# Altium PCB PCB balance.PcbDoc
Units mil, origin at the board's own origin, x right, y up, seen from the top; angles counter-clockwise.
Board outline 3947.04 x 3164.64 mil, 2 copper layers (Top Layer, Bottom Layer); 67 components, 78 nets, 302 pads, 105 vias.
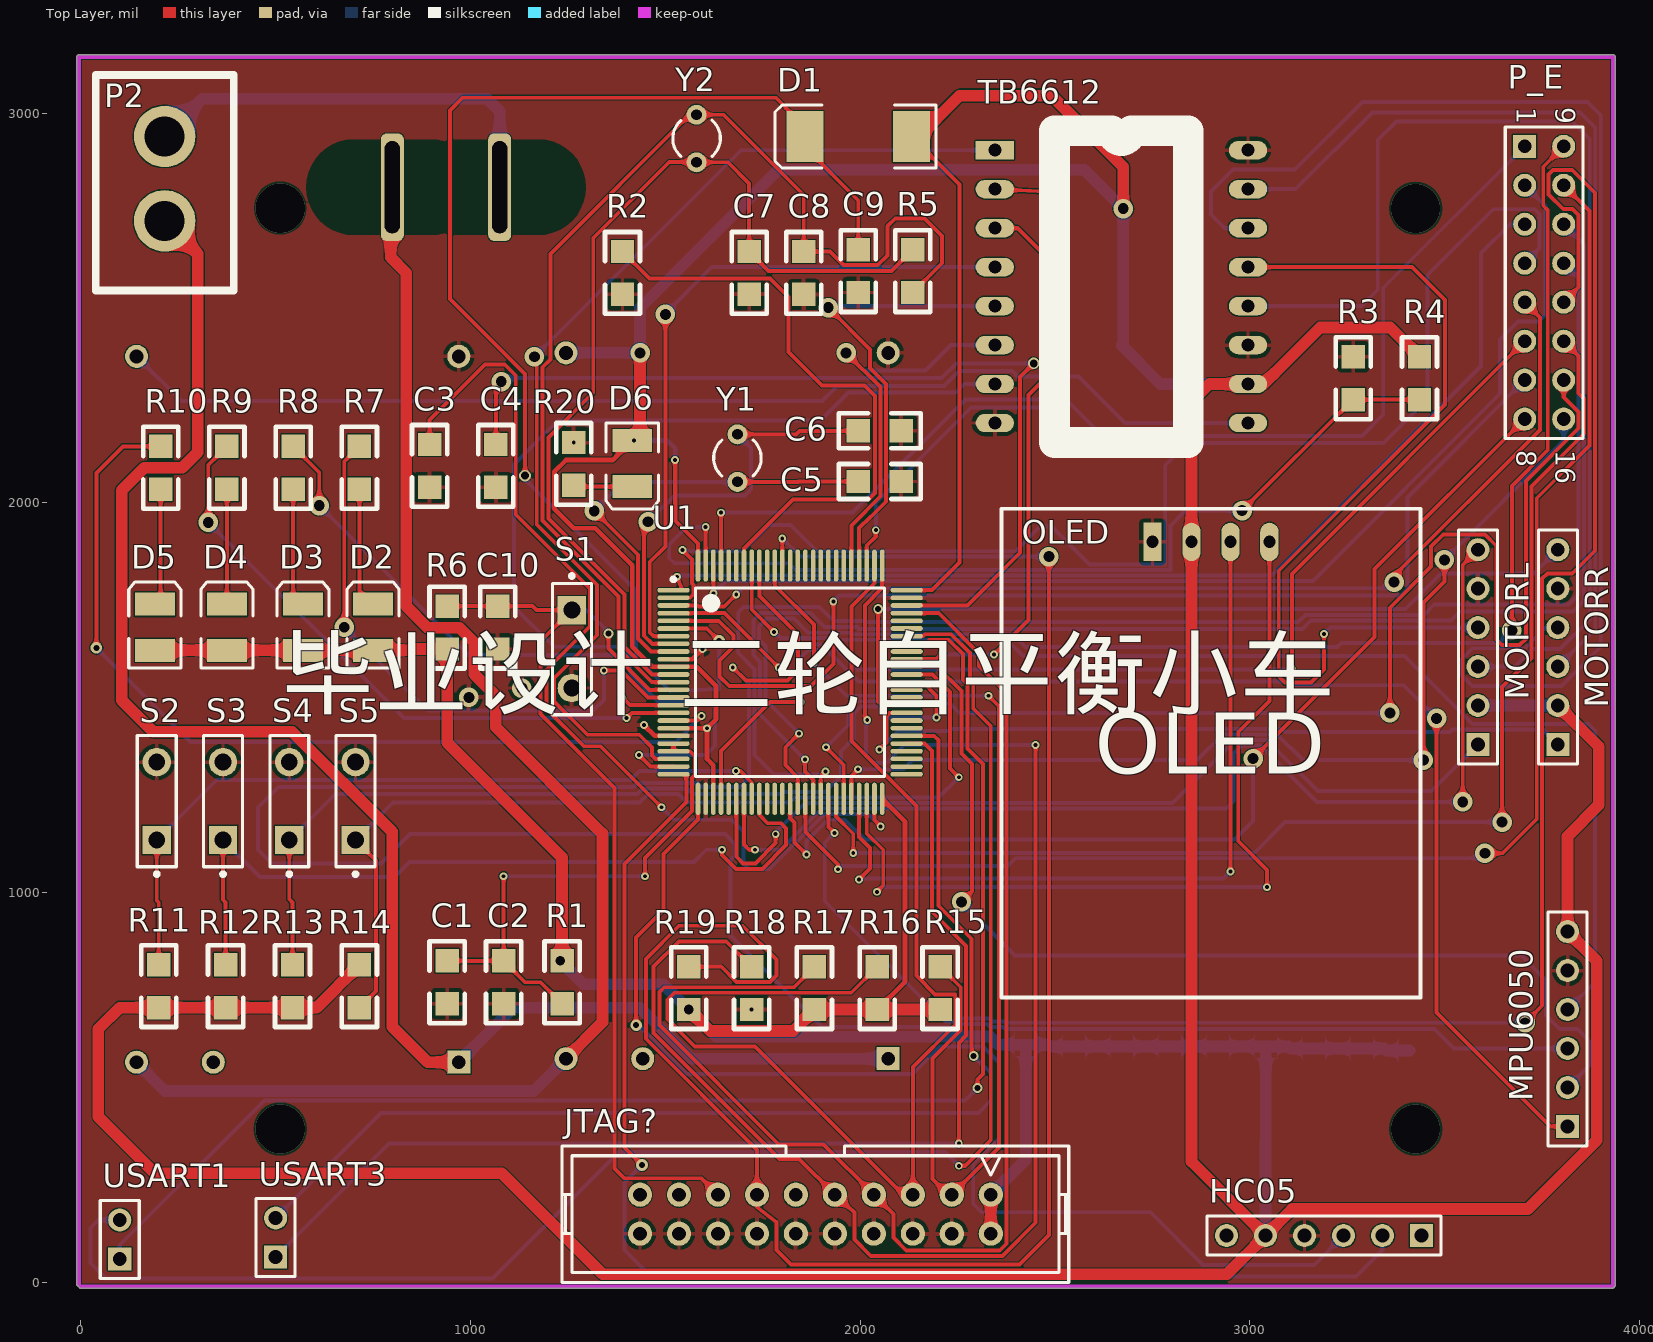
[diagram p0: Top Layer view]
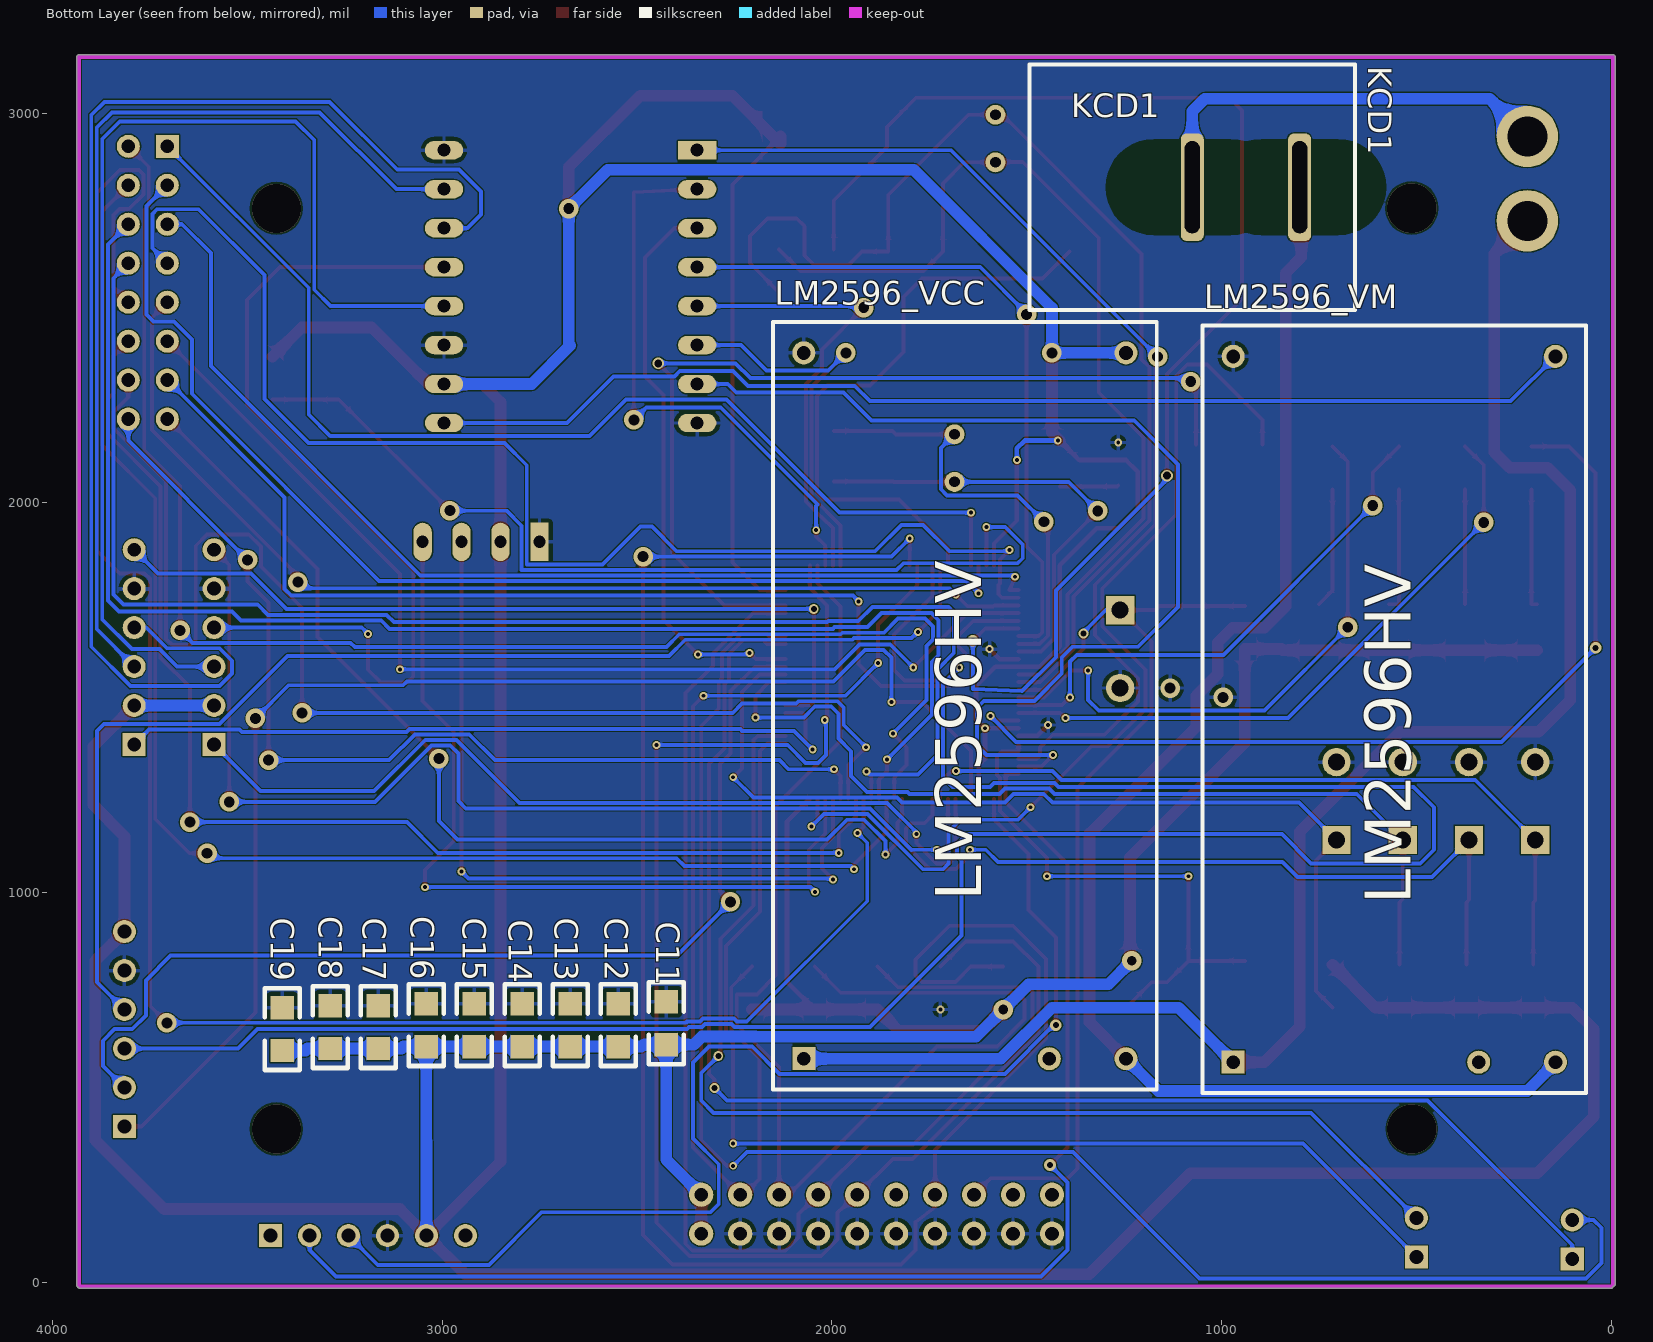
[diagram p1: Bottom Layer view, seen from below]
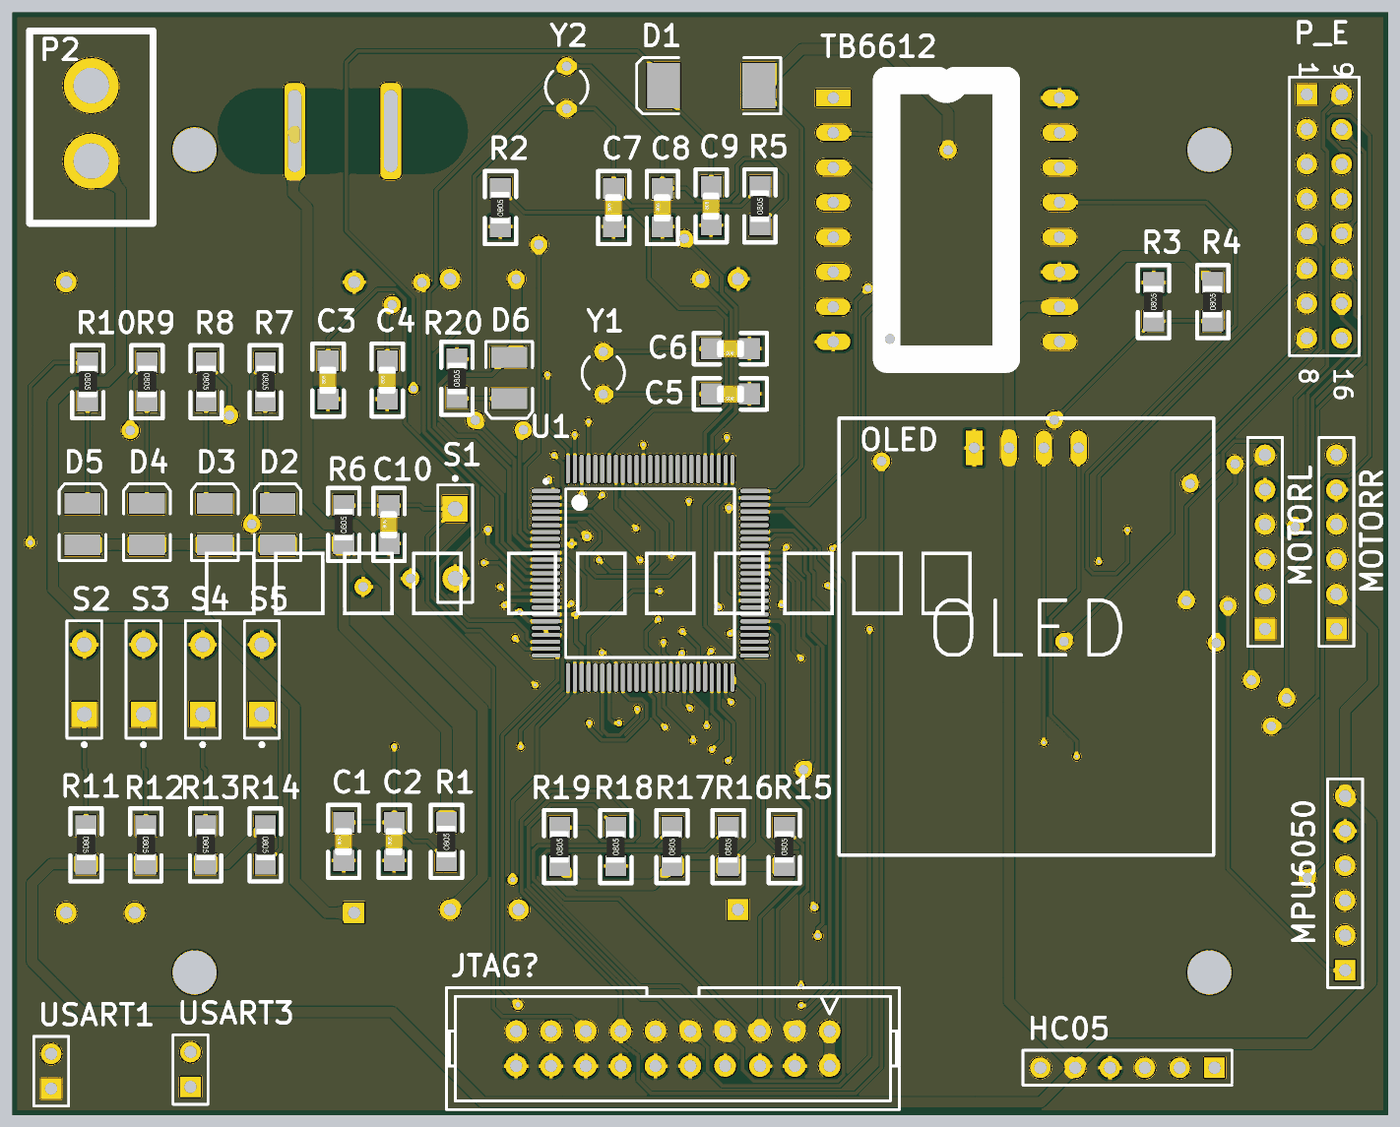
[diagram p2: 3D render of the assembled board from above, using the file's embedded part models]
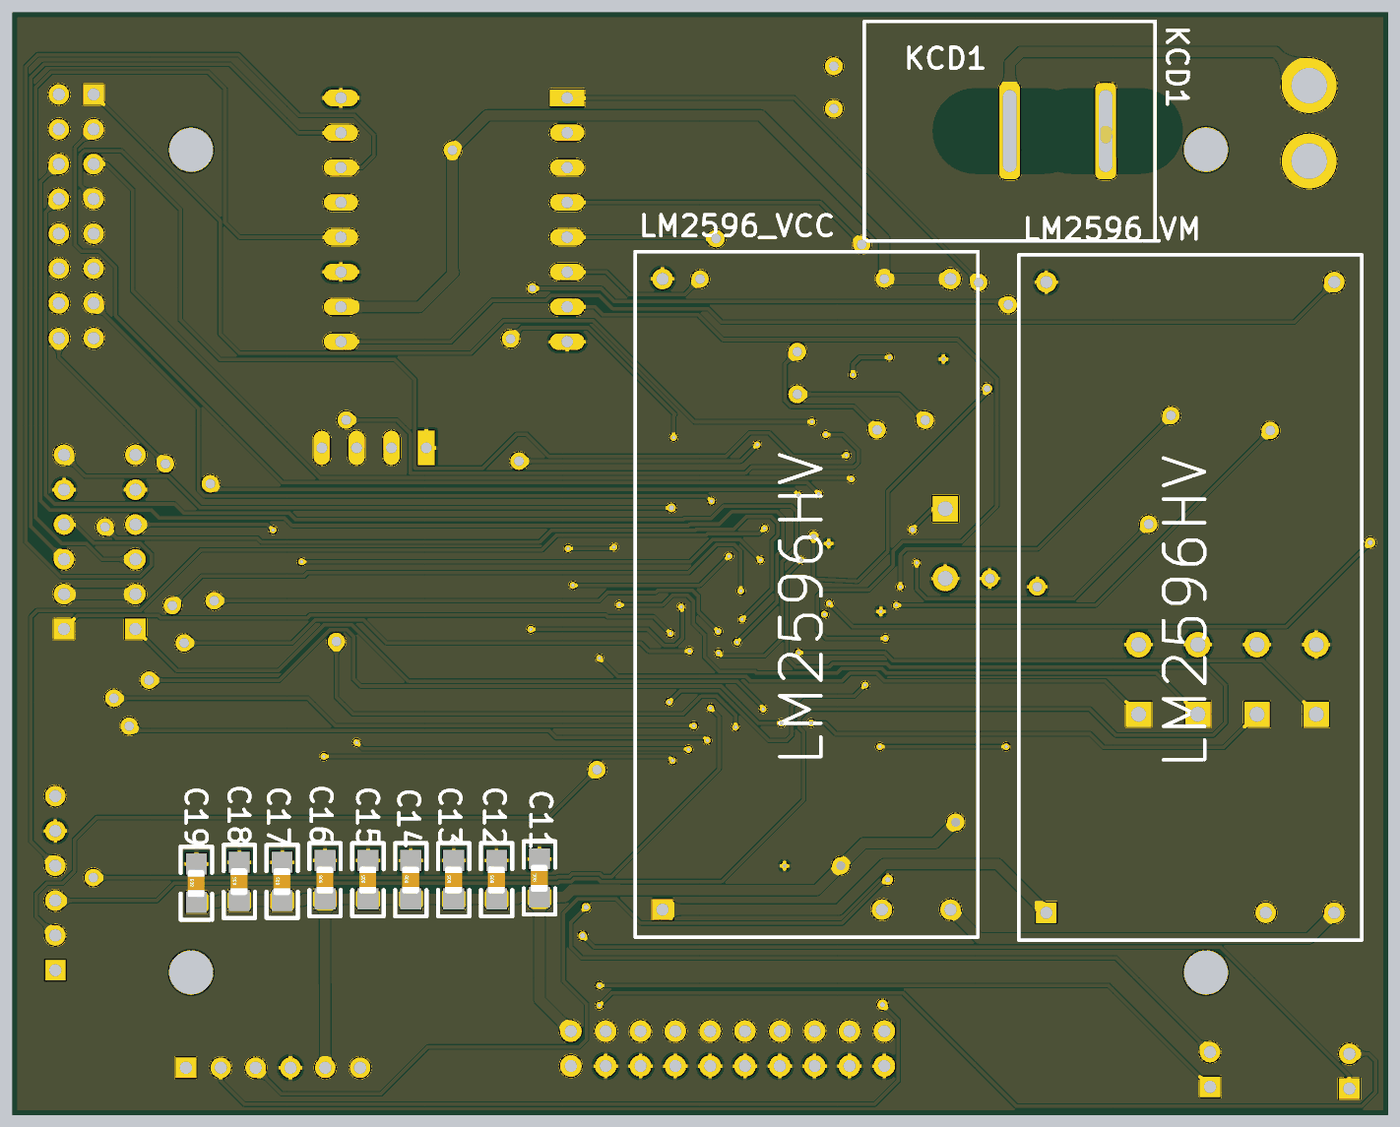
[diagram p3: 3D render of the assembled board from below, using the file's embedded part models]

## Layer stack, top to bottom
Top Solder: solder mask 0.4, Solder Resist, Dk 3.5
Top Layer: signal copper 1.4
Dielectric 1: dielectric 12.6, FR-4, Dk 4.8
Bottom Layer: signal copper 1.4
Bottom Solder: solder mask 0.4, Solder Resist, Dk 3.5

## Board outline
-8.53,-8.56 cw(c-5,-5) -10.01,-5 -10.01,3144.61 cw(c-5,3144.61) -5,3149.62 3932.01,3149.62 cw(c3932.01,3144.61) 3937.02,3144.61 3937.02,-7.99 cw(c3932.01,-7.99) 3934.41,-12.4 3934.4,-12.4 cw(c3930,-10) 3930,-15.01 0,-15.01 cw(c0,-10) -3.56,-13.53 -3.55,-13.55

## Design rules (kind name [scope] priority, off if disabled: settings)
Clearance [All] p1: gap=3 ignorepadtopadclearanceinfootprint=FALSE except(5: Arc-Hole Track-Hole SMDPad-Hole THPad-Hole Via-Hole Fill-Hole Poly-Hole Region-Hole Text-Hole)
PolygonConnect [All] p1: connectstyle=Relief reliefconductorwidth=10 reliefentries=4 polygonreliefangle="90 Angle" airgapwidth=10
RoutingVias [All] p1: holewidth=28 width=50 viastyle="Through Hole" minholewidth=28 minwidth=50 maxholewidth=28 maxwidth=50
SolderMaskExpansion [All] p1: expansion=4
Width [All] p1: maxlimit=50 minlimit=10 preferedwidth=10
30 further rules are at their usual default settings.

## Components (designator, comment, footprint, x,y, rotation, side; value= is the part's Value field where it differs from the comment)
C1 "Cap" 1005(C) 940,715 r90 top value=104/0.1uF
C2 "Cap" 1005(C) 1085,715 r90 top value=106/10uF
C3 "Cap" 1005(C) 895,2040 r90 top value=2.2uf
C4 "Cap" 1005(C) 1065,2040 r90 top value=2.2uf
C5 "Cap" 1005(C) 2105,2055 r180 top value=10pF
C6 "Cap" 1005(C) 2105,2185 r180 top value=10pF
C7 "Cap" 1005(C) 1715,2535 r90 top value=22pF
C8 "Cap" 1005(C) 1855,2535 r90 top value=22pF
C9 "Cap" 1005(C) 1995,2540 r90 top value=104/0.1uf
C10 "Cap" 1005(C) 1070,1625 r90 top value=10uF
C11 "0.1uf" 1005(C) 2425,610 r90 bottom
C12 "0.1uf" 1005(C) 2548.12,605 r90 bottom
C13 "0.1uf" 1005(C) 2671.25,605 r90 bottom
C14 "0.1uf" 1005(C) 2794.37,605 r90 bottom
C15 "0.1uf" 1005(C) 2917.5,605 r90 bottom
C16 "0.1uf" 1005(C) 3040.62,605 r90 bottom
C17 "0.1uf" 1005(C) 3163.75,600 r90 bottom
C18 "0.1uf" 1005(C) 3286.87,600 r90 bottom
C19 "0.1uf" 1005(C) 3410,595 r90 bottom
D1 "Diode" SMC 1995,2940 r180 top
D2 "LED3" 3.5X2.8X1.9 750,1680.94 r90 top
D3 "LED3" 3.5X2.8X1.9 570,1680.94 r90 top
D4 "LED3" 3.5X2.8X1.9 375,1680.94 r90 top
D5 "LED3" 3.5X2.8X1.9 190,1680.94 r90 top
D6 "LED3" 3.5X2.8X1.9 1415,2100.94 r270 top
HC05 "HC05" HDR1X6 3440,120 r180 top
JTAG? "JTAG" JTAG_20 1885,175 r180 top
KCD1 "KCD1" KCD1 1075,2810 r180 bottom
LM2596_VCC "LM2596HV" LM2596HV 2071.77,573.98 r90 bottom
LM2596_VM "LM2596HV" LM2596HV 970,565 r90 bottom
MOTORL "MOTORL" HDR1X6 3585,1380 r90 top
MOTORR "MOTORR" HDR1X6 3790,1380 r90 top
MPU6050 "MPU6050" HDR1X6 3815,400 r90 top
OLED "OLED" OLED 2750,1900 r0 top
P2 "Battery" 电源底座 260,2800 r270 top
P_E "Header 8X2A" HDR2X8_CEN 3705,2915 r270 top
R1 "10R" 1005(R) 1235,715 r90 top
R2 "10K" 1005(R) 1390,2535 r90 top
R3 "0R" 1005(R) 3265,2265 r90 top
R4 "0R" 1005(R) 3435,2265 r90 top
R5 "1M" 1005(R) 2135,2540 r90 top
R6 "10K" 1005(R) 940,1625 r90 top
R7 "1K" 1005(R) 715,2145 r270 top
R8 "1K" 1005(R) 545,2145 r270 top
R9 "1K" 1005(R) 375,2145 r270 top
R10 "1K" 1005(R) 205,2145 r270 top
R11 "1K" 1005(R) 200,815 r270 top
R12 "1K" 1005(R) 371.67,815 r270 top
R13 "1K" 1005(R) 543.33,815 r270 top
R14 "1K" 1005(R) 715,815 r270 top
R15 "10K" 1005(R) 2205,700 r90 top
R16 "10K" 1005(R) 2043.75,700 r90 top
R17 "10K" 1005(R) 1882.5,700 r90 top
R18 "10K" 1005(R) 1721.25,700 r90 top
R19 "10K" 1005(R) 1560,700 r90 top
R20 "470R" 1005(R) 1265,2045 r90 top
S1 "SW-PB" SPST-2 1260,1625 r270 top
S2 "SW-SPST" SPST-2 195,1235 r90 top
S3 "SW-SPST" SPST-2 365,1235 r90 top
S4 "SW-SPST" SPST-2 535,1235 r90 top
S5 "SW-SPST" SPST-2 705,1235 r90 top
TB6612 "TB6612" TB6612 2345.39,2905 r0 top
U1 "STM32F407V" LQFP-100_M 1820,1540 r0 top
USART1 "Header 2" HDR1X2 100,60 r90 top
USART3 "Header 2" HDR1X2 500,65 r90 top
Y1 "XTAL" R38 1685,2115 r180 top
Y2 "XTAL" R38 1580,2935 r180 top

## Footprints (in the part's own frame and the unit in brackets; to place one, negate y for a bottom-side part, rotate by r counter-clockwise, add the part's x,y. Pads: shape width x height; smd on the part's side, far side on the other; paste and mask are expansions set on the pad)
3.5X2.8X1.9 [mm] "SM LED; 2 C-Bend Leads; Body 3.5 x 2.8 x 1.9 mm, inc leads (LxWxH typ)"
  rect 1.5x2.6 smd: 1(-1.5,0) 2(1.5,0)
  silkscreen extent -2.65,-1.7 2.95,1.7
1005(C) [mil]
  rect 60x60 smd: 1(0,0) 2(110,0)
  silkscreen extent -50,-45 160,45, body extent 15,-24 94,25, height 31
1005(R) [mil]
  rect 60x60 smd: 1(0,0) 2(110,0)
  silkscreen extent -50,-45 160,45, body extent 9,-26 100,27, height 30
HDR1X2 [mm] "Connector; Header; 2 Position"
  rect 1.5x1.5 hole 0.9: 1(0,0)
  round 1.5 hole 0.9: 2(2.54,0)
  silkscreen extent -1.27,-1.27 3.81,1.27
HDR1X6 [mm] "Connector; Header; 6 Position"
  rect 1.5x1.5 hole 0.9: 1(0,0)
  round 1.5 hole 0.9: 2(2.54,0) 3(5.08,0) 4(7.62,0) 5(10.16,0) 6(12.7,0)
  silkscreen extent -1.27,-1.27 13.97,1.27
HDR2X8_CEN [mm] "Connector; Header; 8x2 Position"
  rect 1.5x1.5 hole 0.9: 1(0,0)
  round 1.5 hole 0.9: 2(2.54,0) 3(5.08,0) 4(7.62,0) 5(10.16,0) 6(12.7,0) 7(15.24,0) 8(17.78,0) 9(0,2.54) 10(2.54,2.54) 11(5.08,2.54) 12(7.62,2.54) 13(10.16,2.54) 14(12.7,2.54) 15(15.24,2.54) 16(17.78,2.54)
  silkscreen extent -1.27,-1.27 19.05,3.81
JTAG_20 [mil]
  round 62 hole 35: 1(-450,-50) 2(-450,50) 3(-350,-50) 4(-350,50) 5(-250,-50) 6(-250,50) 7(-150,-50) 8(-150,50) 9(-50,-50) 10(-50,50) 11(50,-50) 12(50,50) 13(150,-50) 14(150,50) 15(250,-50) 16(250,50) 17(350,-50) 18(350,50) 19(450,-50) 20(450,50)
  silkscreen extent -650,-175 650,175
KCD1 [mm]
  rrect50% 1.5x7 hole 6 slot 1 at 0 deg: 1(0,0) 2(7,0)
  silkscreen extent -10.6,-8 10.6,8
LM2596HV [mm]
  rect 1.5x1.5 hole 0.9: 1(0,0)
  round 1.5 hole 0.9: 2(0,-16) 3(0,-21) 4(46,0) 5(46,-21)
  silkscreen extent -2,-23 48,2
LQFP-100_M [mm] "Thin QFP, 100"
  oval 2.1x0.3 smd: 1(-7.6,6) 2(-7.6,5.5) 3(-7.6,5) 4(-7.6,4.5) 5(-7.6,4) 6(-7.6,3.5) 7(-7.6,3) 8(-7.6,2.5) 9(-7.6,2) 10(-7.6,1.5) 11(-7.6,1) 12(-7.6,0.5) 13(-7.6,0) 14(-7.6,-0.5) 15(-7.6,-1) 16(-7.6,-1.5) 17(-7.6,-2) 18(-7.6,-2.5) 19(-7.6,-3) 20(-7.6,-3.5) 21(-7.6,-4) 22(-7.6,-4.5) 23(-7.6,-5) 24(-7.6,-5.5) 25(-7.6,-6) 51(7.6,-6) 52(7.6,-5.5) 53(7.6,-5) 54(7.6,-4.5) 55(7.6,-4) 56(7.6,-3.5) 57(7.6,-3) 58(7.6,-2.5) 59(7.6,-2) 60(7.6,-1.5) 61(7.6,-1) 62(7.6,-0.5) 63(7.6,0) 64(7.6,0.5) 65(7.6,1) 66(7.6,1.5) 67(7.6,2) 68(7.6,2.5) 69(7.6,3) 70(7.6,3.5) 71(7.6,4) 72(7.6,4.5) 73(7.6,5) 74(7.6,5.5) 75(7.6,6)
  oval 0.3x2.1 smd: 26(-6,-7.6) 27(-5.5,-7.6) 28(-5,-7.6) 29(-4.5,-7.6) 30(-4,-7.6) 31(-3.5,-7.6) 32(-3,-7.6) 33(-2.5,-7.6) 34(-2,-7.6) 35(-1.5,-7.6) 36(-1,-7.6) 37(-0.5,-7.6) 38(0,-7.6) 39(0.5,-7.6) 40(1,-7.6) 41(1.5,-7.6) 42(2,-7.6) 43(2.5,-7.6) 44(3,-7.6) 45(3.5,-7.6) 46(4,-7.6) 47(4.5,-7.6) 48(5,-7.6) 49(5.5,-7.6) 50(6,-7.6) 76(6,7.6) 77(5.5,7.6) 78(5,7.6) 79(4.5,7.6) 80(4,7.6) 81(3.5,7.6) 82(3,7.6) 83(2.5,7.6) 84(2,7.6) 85(1.5,7.6) 86(1,7.6) 87(0.5,7.6) 88(0,7.6) 89(-0.5,7.6) 90(-1,7.6) 91(-1.5,7.6) 92(-2,7.6) 93(-2.5,7.6) 94(-3,7.6) 95(-3.5,7.6) 96(-4,7.6) 97(-4.5,7.6) 98(-5,7.6) 99(-5.5,7.6) 100(-6,7.6)
  silkscreen extent -7.72,-6.15 6.15,6.82, body extent -7,-7 7,7, height 0.8
OLED [mm]
  rect 1.2x2.5 hole 0.8: 1(0,0)
  oval 1.2x2.5 hole 0.8: 2(2.54,0) 3(5.08,0) 4(7.62,0)
  silkscreen extent -9.84,-29.7 17.46,2.16
R38 [mm] "Crystal, Thru-Hole; 2 Leads; Body 3.1 x 8.2 mm (Dia.xH)"
  round 1.3 hole 0.7: 1(0,1.55) 2(0,-1.55)
  silkscreen extent -1.55,-1.19 1.55,1.17
SMC [mm] "DO-214-AB/SMC; 2 C-Bend Leads; Body 7.9 x 5.9 mm, inc. leads (LxW)"
  rect 2.4x3.3 smd: 1(-3.475,0) 2(3.475,0)
  silkscreen extent -5.08,-2.05 5.42,2.06
SPST-2 [mm] "Switch; 2 Leads"
  rect 1.85x1.85 hole 1.1: 1(-2.54,0)
  round 1.85 hole 1.1: 2(2.54,0)
  silkscreen extent -4.89,-1.27 4.28,1.27
TB6612 [mm]
  rect 2.5x1.2 hole 0.85: 1(0,0)
  oval 2.5x1.2 hole 0.85: 2(0,-2.54) 3(0,-5.08) 4(0,-7.62) 5(0,-10.16) 6(0,-12.7) 7(0,-15.24) 8(0,-17.78) 9(16.5,-17.78) 10(16.5,-15.24) 11(16.5,-12.7) 12(16.5,-10.16) 13(16.5,-7.62) 14(16.5,-5.08) 15(16.5,-2.54) 16(16.5,0)
  silkscreen extent 3.88,-19.05 12.62,1.27
电源底座 [mm]
  round 4 hole 2.6: 1(-3.564,-1.138) 2(1.936,-1.138)
  silkscreen extent -7.56,-5.64 6.48,3.36

## Part data
C1 C2 C3 C4 C5 C6 C7 C8 C9 C10: "Capacitor", LatestRevisionDate=17-Jul-2002, LatestRevisionNote="Re-released for DXP Platform.", PackageDescription="Radial Cap, Thru-Hole; 2 Leads; 0.3 in Pin Spacing", PackageReference=RAD-0.3, Published=8-Jun-2000, Publisher="Altium Limited"
C11 C12 C13 C14 C15 C16 C17 C18 C19: library part Cap, "Capacitor", LatestRevisionDate=17-Jul-2002, LatestRevisionNote="Re-released for DXP Platform.", PackageDescription="Radial Cap, Thru-Hole; 2 Leads; 0.3 in Pin Spacing", PackageReference=RAD-0.3, Published=8-Jun-2000, Publisher="Altium Limited"
D1: "Default Diode", Code_JEDEC=DO-214-AB, LatestRevisionDate=17-Jul-2002, LatestRevisionNote="Re-released for DXP Platform.", PackageDescription="DO-214-AB/SMC; 2 C-Bend Leads; Body 7.9 x 5.9 mm, inc. leads (LxW)", PackageReference=SMC, PackageVersion=Sep-1996, Published=8-Jun-2000, Publisher="Altium Limited"
D2 D3 D4 D5 D6: "Typical BLUE SiC LED", DatasheetVersion=16-Apr-2002, LatestRevisionDate=17-Dec-2003, LatestRevisionNote="PCB Footprint replaced.", PackageDescription="SM LED; 2 C-Bend Leads; Body 3.5 x 2.8 x 1.9 mm, inc leads (LxWxH typ)", PackageReference=3.5X2.8X1.9, PackageVersion=16-Apr-2002, Published=8-Jun-2000, Publisher="Altium Limited"
HC05 MOTORL MOTORR MPU6050: library part "Header 6", "Header, 6-Pin", LatestRevisionDate=17-Jul-2002, LatestRevisionNote="Re-released for DXP Platform.", Publisher="Altium Limited"
P_E: "Header, 8-Pin, Dual row", LatestRevisionDate=17-Jul-2002, LatestRevisionNote="Re-released for DXP Platform.", Publisher="Altium Limited"
R1 R2 R3 R4 R5 R6 R7 R8 R9 R10 R11 R12 R13 R14 R15 R16 R17 R18 R19 R20: library part Res2, "Resistor", LatestRevisionDate=17-Jul-2002, LatestRevisionNote="Re-released for DXP Platform.", PackageDescription="Axial Device, Thru-Hole; 2 Leads; 0.4 in Pin Spacing", PackageReference=AXIAL-0.4, Published=8-Jun-2000, Publisher="Altium Limited"
S1: "Switch", LatestRevisionDate=17-Jul-2002, LatestRevisionNote="Re-released for DXP Platform.", PackageDescription="Switch; 2 Leads", PackageReference=SPST-2, Published=24-Mar-1999, Publisher="Altium Limited"
S2 S3 S4 S5: "Single-Pole, Single-Throw Switch", LatestRevisionDate=17-Jul-2002, LatestRevisionNote="Re-released for DXP Platform.", PackageDescription="Switch; 2 Leads", PackageReference=SPST-2, Published=24-Mar-1999, Publisher="Altium Limited"
U1: "STM32单片机100引脚"
USART1 USART3: "Header, 2-Pin", LatestRevisionDate=17-Jul-2002, LatestRevisionNote="Re-released for DXP Platform.", Publisher="Altium Limited"
Y1 Y2: "Crystal Oscillator", LatestRevisionDate=17-Jul-2002, LatestRevisionNote="Re-released for DXP Platform.", PackageDescription="Crystal, Thru-Hole; 2 Leads; Body 3.1 x 8.2 mm (Dia.xH)", PackageReference=R38, Published=8-Jun-2000, Publisher="Altium Limited"
TB6612: LatestRevisionDate=17-Jul-2002, LatestRevisionNote="Re-released for DXP Platform.", Publisher="Altium Limited"

## Via types
v1: diameter 20, hole 10, Top Layer to Bottom Layer, 59 vias
v2: diameter 50, hole 28, Top Layer to Bottom Layer, 29 vias
v3: diameter 125.98, hole 125.98, Top Layer to Bottom Layer, 5 vias
v4: diameter 25, hole 15, Top Layer to Bottom Layer, 4 vias
v5: diameter 30, hole 15, Top Layer to Bottom Layer, 4 vias
v6: diameter 30, hole 20, Top Layer to Bottom Layer, 2 vias
v7: diameter 50, hole 25, Top Layer to Bottom Layer, 2 vias

## Nets (pads, with @x,y where several pads share a name; then routed paths per layer and width w, separated by ;. In a path a pad name is that pad's centre, name@x,y a point inside that pad or via, vN(x,y) a via of type N, cw(c..) or ccw(c..) an arc to the next point about the centre after c; other vN are vias at no path point)
AIN1: TB6612.3 U1.66 | length 1472
  Top Layer w10: U1.66 2195,1599.06 v1(2211,1615.06) ; v1(2343,1611) 2431.88,1699.88 2431.88,2277 2478.94,2324.06 2478.94,2630.06 2404,2705 TB6612.3
  Bottom Layer w10: v1(2211,1615.06) 2215.06,1611 v1(2343,1611)
AIN2: TB6612.2 U1.78 | length 1503.2
  Top Layer w10: U1.78 2016.85,1890.85 2040,1914 v1(2040,1930) ; TB6612.2 2508,2797 v2(2508,2213)
  Bottom Layer w10: v1(2040,1930) 2040,1992 2036,1996 2285,2245 2476,2245 v2(2508,2213)
AO1: MOTORL.3 TB6612.12 | length 2887
  Bottom Layer w10: TB6612.12 3286,2505 3328,2547 3328,2931 3376,2979 3827,2979 3872,2934 3872,1701 3796,1625 3724.88,1625 3679.88,1580 MOTORL.3
AO2: MOTORL.4 TB6612.13 | length 2312.2
  Top Layer w10: TB6612.13 3416,2605 3500,2521 3500,2252 3074,1826 3074,1555 3090,1539 3157,1539 3190,1572 v1(3190,1664)
  Bottom Layer w10: v1(3190,1664) 3206,1680 MOTORL.4
BIN1: TB6612.5 U1.79 | length 1181.2
  Top Layer w10: v2(1918,2501) 2025,2394 2025,2346 2066,2305 2066,2003 2026.94,1963.94 2025.94,1963.94 1997.17,1935.16 U1.79
  Bottom Layer w10: v2(1918,2501) 1922,2505 TB6612.5
BIN2: TB6612.6 U1.80 | length 1040.1
  Top Layer w10: v2(1964,2385) 2052.06,2296.94 2052.06,2017.06 1977.48,1942.48 U1.80
  Bottom Layer w10: v2(1964,2385) 2009,2340 2168,2340 2233,2405 TB6612.6
BO1: MOTORR.3 TB6612.15 | length 2411.5
  Bottom Layer w10: TB6612.15 3117,2805 3314,3002 3847,3002 3886,2963 3886,1676 MOTORR.3
BO2: MOTORR.4 TB6612.14 | length 3377.2
  Bottom Layer w10: TB6612.14 2935,2705 2900,2740 2900,2799 2956,2855 3115,2855 3289,3029 3866,3029 3900,2995 3900,1631 3799,1530 3571,1530 3539,1562 3539,1595.06 3571,1627.06 3706,1627.06 3758.94,1680 MOTORR.4
"encoderA T3C1": MOTORL.1 U1.31 | length 2310.2
  Top Layer w10: U1.31 1682.2,1190.94 1682.06,1190.8 1682.06,1092 1699,1075.06 1731,1075.06 1783,1127.06 v1(1783,1150)
  Bottom Layer w10: v1(1783,1150) 1783,1155 1858.06,1230.06 2801.19,1230.06 2963,1391.88 3043,1391.88 3174.24,1260.63 3465.63,1260.63 MOTORL.1
"encoderA T3C2": MOTORL.6 U1.32 | length 2873.7
  Top Layer w10: U1.32 1701.89,1123.11 1715,1110 v1(1730,1110) ; v2(3546,1233) 3546,1841 MOTORL.6
  Bottom Layer w10: v1(1730,1110) 1794,1110 1795,1109 1902.12,1216.12 2939.19,1216.12 2958.06,1235 2958.06,1357 2979,1377.94 3027,1377.94 3171.94,1233 v2(3546,1233)
"encoderB T4C1": MOTORR.1 U1.59 | length 1933.9
  Top Layer w10: v1(2049,1367) 2067,1385 2067,1453.26 2075,1461.26 U1.59
  Bottom Layer w10: v1(2049,1367) 2097.06,1415.06 2229.94,1415.06 2234.63,1419.75 3083.75,1419.75 3091.44,1412.06 3512.87,1412.06 3519.28,1418.47 3751.53,1418.47 MOTORR.1
"encoderB T4C2": MOTORR.6 U1.60 | length 2121.8
  Top Layer w10: v4(2046,1728) 2046,1490.15 2055.21,1480.94 U1.60
  Bottom Layer w10: v4(2046,1728) 3398.76,1728 3489.76,1819 3729,1819 MOTORR.6
GND: C1.1 C2.1 C3.1 C4.1 C5.1 C6.1 C7.1 C8.1 C9.1 C10.1 C11.2 C12.2 C13.2 C14.2 C15.2 C16.2 C17.2 C18.2 C19.2 HC05.4 JTAG?.4 JTAG?.6 JTAG?.8 JTAG?.10 JTAG?.12 JTAG?.14 JTAG?.16 JTAG?.18 JTAG?.20 LM2596_VCC.4 LM2596_VM.4 MOTORL.5 MOTORR.5 MPU6050.5 OLED.1 R2.1 R3.2 R18.1 R20.2 S1.2 S2.2 S3.2 S4.2 S5.2 TB6612.8 TB6612.11 TB6612.16 U1.10 U1.20 U1.27 U1.74 | length 172.3
  Top Layer w12: v1(1445,1430) 1472.8,1402.2 U1.20 ; U1.10 1569.06,1599.06 v1(1595,1625)
  other v1: 1721.25,700 1265,2155
  other v2: 996,1501 1132,1525
"IIC SCL": MPU6050.3 U1.92 | length 6004.2
  Top Layer w10: v1(1673,1578) 1706.94,1544.06 1813.06,1544.06 1840,1571 1840,1662.26 1741.26,1761 U1.92
  Bottom Layer w10: v1(1673,1578) 1715,1536 1715,1295 1691,1271 1593.63,1271 1583.81,1280.81 1428.19,1280.81 1418.37,1271 507,1271 455,1219 455,1110 490,1075 770,1075 845,1150 1652.99,1150 1678.94,1124.06 1678.94,1095.94 1667,1084.01 1667,890 1902.06,654.94 2249.24,654.94 2257.11,662.81 2324.89,662.81 2332.76,654.94 2365.91,654.94 2370.85,650 3474,650 3524,600 MPU6050.3
"IIC SDA": MPU6050.4 U1.93 | length 3149.2
  Top Layer w10: U1.93 1721.57,1726.43 v1(1779,1669)
  Bottom Layer w10: v1(1779,1669) 1795.06,1652.94 1942.88,1652.94 1946.82,1648.99 2376.01,1648.99 2418,1607 3396.84,1607 3570.84,1433 3867,1433 3885,1415 3885,770 MPU6050.4
KEY0: R11.1 S2.1 U1.33 | length 1976.2
  Top Layer w10: S2.1 195,980 200,975 R11.1 ; v1(1681,1312) 1692.57,1312 1721.57,1283 U1.33
  Bottom Layer w10: S2.1 349,1289 1410.62,1289 1433.62,1312 v1(1681,1312)
KEY1: R12.1 S3.1 U1.34 | length 2056.8
  Top Layer w10: S3.1 365,981.67 371.67,975 R12.1 ; v1(1645,1110) 1645,1097 1680.88,1061.12 1748.83,1061.12 1810,1122.3 1810,1165 1797.06,1177.94 1762.06,1177.94 1741.26,1198.74 U1.34
  Bottom Layer w10: S3.1 460,1040 805,1040 844,1079 1574,1079 1605,1110 v1(1645,1110)
KEY2: R13.1 S4.1 U1.63 | length 2371.4
  Top Layer w10: S4.1 535,983.33 543.33,975 R13.1 ; U1.63 2161,1540 2196,1505 v1(2196,1449)
  Bottom Layer w10: S4.1 653,1253 1428.25,1253 1442.12,1266.88 1556,1266.88 1569.88,1253 1801.04,1253 1805.98,1257.94 1909.61,1257.94 1950.68,1299 1950.68,1362.68 1983.13,1395.13 1983.13,1459 2001.31,1477.19 2043.59,1477.19 2071.78,1449 v1(2196,1449)
KEY3: R14.2 S5.1 U1.64 | length 2460.5
  Top Layer w10: S5.1 758,1082 758,748 R14.2 ; U1.64 2185.31,1559.69 2230,1515 2230,1319 v1(2253,1296)
  Bottom Layer w10: S5.1 801,1231 1434.12,1231 1456.06,1252.94 1534,1252.94 1555.94,1231 1820,1231 1833,1244 2201,1244 v1(2253,1296)
LED0: R7.1 U1.15 | length 1529.4
  Top Layer w10: v2(676,1681) 676,2106 R7.1 ; v1(1342.12,1570) 1386,1570 1455.37,1500.63 U1.15
  Bottom Layer w10: v2(676,1681) 890,1467 1315,1467 1342.12,1494.12 v1(1342.12,1570)
LED1: R8.1 U1.16 | length 1354.3
  Top Layer w10: R8.1 612,2078 v2(612,1993) ; v1(1389,1501) 1409.06,1480.94 U1.16
  Bottom Layer w10: v2(612,1993) 994.86,1610.14 1371.52,1610.14 1389,1592.66 v1(1389,1501)
LED2: R9.1 U1.17 | length 1622.1
  Top Layer w10: v2(327,1950) 327,2097 R9.1 ; v1(1400.5,1448) 1413.76,1461.26 U1.17
  Bottom Layer w10: v2(327,1950) 829,1448 v1(1400.5,1448)
LED3: R10.1 U1.18 | length 2399.3
  Top Layer w10: v5(40,1628) 40,2077 108,2145 R10.1 ; U1.18 1581.57,1441.57 v1(1593,1453)
  Bottom Layer w10: v5(40,1628) 281.06,1386.94 1526.94,1386.94 v1(1593,1453)
"MPU AD4": MPU6050.1 U1.29 | length 3417.7
  Top Layer w10: U1.29 1642.83,1363 1768.83,1489 v1(1847,1489) ; v2(3479,1447) 3479,692 3771,400 MPU6050.1
  Bottom Layer w10: v1(1847,1489) 1847,1603 1866.94,1622.94 1915,1622.94 1995.94,1542 3090.06,1542 3100.06,1532 3394,1532 v2(3479,1447)
"MPU INT": MPU6050.2 U1.65 | length 2683.1
  Top Layer w10: U1.65 2197.63,1579.37 2259.88,1517.12 2259.88,1357 2286.94,1329.94 2286.94,1003.06 v2(2259.88,976)
  Bottom Layer w10: v2(2259.88,976) 2397.41,838.47 3696.53,838.47 3760,775 3760,685 3795,650 3840,650 3870,620 3870,555 MPU6050.2
NetC1_2: C1.2 C2.2 R1.1 U1.21 U1.22 | length 1361.7
  Top Layer w10: C1.2 C2.2 ; v1(1085,1042) C2.2 ; R1.1 1180,770 1140,770 C2.2 ; v1(1448,1042) 1448,1089 1568,1209 1568,1294 1576,1302 1576,1349.83 1563,1362.83 U1.22 U1.21
  Bottom Layer w10: v1(1085,1042) v1(1448,1042)
NetC3_2: C3.2 U1.49 | length 2561.3
  Top Layer w10: C3.2 895,2213.19 1036.81,2355 1087.81,2355 1116.06,2326.75 1116.06,1970.64 1306,1780.71 1306,1683 1195,1572 1195,1471.41 1290.81,1375.61 1333.39,1375.61 v1(1490,1219) ; U1.49 2036.54,1186 v1(2052.54,1170)
  Bottom Layer w10: v1(1490,1219) 1522,1187 1669.99,1187 1700,1156.99 1700,1087.3 1698.85,1086.15 1700,1085 1700,1075 1715,1060 1766,1060 1908.19,1202.19 2020.35,1202.19 v1(2052.54,1170)
NetC4_2: C4.2 U1.73 | length 2399.5
  Top Layer w10: C4.2 1065,2297 v2(1079,2311) ; U1.73 2274.79,1736.85 2410,1872.06 2410,2323 v6(2445,2358)
  Bottom Layer w10: v2(1079,2311) 1088,2320 2209,2320 2247,2358 v6(2445,2358)
NetC5_2: C5.2 U1.9 Y1.1 | length 1187.4
  Top Layer w10: v2(1317.54,1979.54) 1430,1867.08 1430,1651.97 1463.23,1618.74 U1.9 ; Y1.1 1840,2053.98 1841.02,2055 C5.2
  Bottom Layer w10: v2(1317.54,1979.54) 1391.98,2053.98 Y1.1
NetC6_2: C6.2 U1.8 Y1.2 | length 1148.9
  Top Layer w10: v2(1455.64,1951.64) 1445,1941 1445,1697.65 1445.69,1696.96 1445.69,1659.23 1466.49,1638.43 U1.8 ; Y1.2 1835,2176.02 1843.97,2185 C6.2
  Bottom Layer w10: v2(1455.64,1951.64) 1523,2019 1704,2019 1720,2035 1720,2141.02 Y1.2
NetC7_2: C7.2 R5.2 U1.12 Y2.1 | length 2475.3
  Top Layer w10: U1.12 1465.31,1559.69 1395,1630 1395,1765 1200,1960 1200,2168 1315,2283 1315,2679.94 1510,2874.94 1579.04,2874.94 Y2.1 1661.02,2873.98 1715,2820 C7.2 1765,2595 2080,2595 R5.2
NetC8_2: C8.2 R5.1 U1.13 Y2.2 | length 2965.1
  Top Layer w10: U1.13 1465,1540 1380,1625 1380,1760 1185,1955 1185,2348.01 1205,2368.01 1205,2639 1562.02,2996.02 Y2.2 1648.98,2996.02 1855,2790 C8.2 1922.06,2645 1957.06,2610 2045,2610 2070,2635 2070,2710 2090,2730 2165,2730 2210,2685 2210,2615 R5.1
NetD2_2: D2.2 R7.2 | length 309.5
  Top Layer w10: R7.2 715,1775 D2.2
NetD3_2: D3.2 R8.2 | length 320
  Top Layer w10: R8.2 545,1740 D3.2
NetD4_2: D4.2 R9.2 | length 295
  Top Layer w10: D4.2 R9.2
NetD5_2: D5.2 R10.2 | length 310
  Top Layer w10: D5.2 205,1740 R10.2
NetD6_2: D6.2 R20.1 | length 151.3
  Top Layer w10: R20.1 1268.11,2041.89 D6.2
NetKCD1_1: KCD1.1 P2.1 | length 1108.1
  Bottom Layer w30: P2.1 311.88,3037 1043,3037 1075,3005 KCD1.1
NetKCD1_2: KCD1.2 LM2596_VCC.3 LM2596_VM.3 | length 3737.4
  Top Layer w30: KCD1.2@799.41,2790 KCD1.2 795,2805.59 795,2630 835,2590 835,1734.64 889.64,1680 971.78,1680 1010,1641.78 1010,1560 1065,1505 1065,1425 1338.5,1151.5 1338.5,667.48 LM2596_VCC.3
  Bottom Layer w30: LM2596_VM.3 143.23,563.64 215.87,491 1162.02,491 LM2596_VCC.3
NetLM2596_VCC_1: LM2596_VCC.1 LM2596_VM.1 P2.2 | length 4159.2
  Top Layer w30: P2.2 300,2638.98 300,2130 260,2090 163,2090 105,2032 105,1494 186,1413 542,1413 799,1156 799,656 890,565 LM2596_VM.1
  Bottom Layer w30: LM2596_VM.1 1110,705 1435,705 1566.02,573.98 LM2596_VCC.1
NetR2_2: R2.2 U1.94 | length 1572.2
  Top Layer w10: R2.2 1459,2576 1768,2576 1816,2528 1816,2387 1901.95,2301.05 2011.13,2301.05 2038.12,2274.06 2038.12,2025.12 2022,2009 1827.89,2009 1701.89,1883 U1.94
PA13: JTAG?.7 R17.2 U1.72 | length 3453.4
  Top Layer w10: R17.2 1829.62,757.12 1497.12,757.12 1485,745 1485,660 1791,354 1906,354 JTAG?.7 2085,175 2085,115 2118,82 2358,82 2375,99 2375,1512 2305,1582 2305,1613.72 2201.56,1717.17 U1.72
PA14: JTAG?.9 R18.2 U1.76 | length 3963.1
  Top Layer w10: R18.2 1656.25,875 1535,875 1470,810 1470,640 1793,317 1843,317 JTAG?.9 1985,179 1985,110 2027,68 2365,68 2450,153 v1(2450,1379) ; v1(2018,1443) 2012.06,1448.94 2012.06,1737.06 2056.22,1781.22 U1.76
  Bottom Layer w10: v1(2018,1443) 2015,1440 2015,1353 2035,1333 2067,1333 2113,1379 v1(2450,1379)
PA15: JTAG?.5 R16.2 U1.77 | length 3264.9
  Top Layer w10: U1.77 2036.54,1793.85 1977.26,1734.58 1977.26,1388.74 2144,1222 2144,787 2192,739 2243.94,739 2243.94,661.06 2135,552.12 JTAG?.5 2110,225 1730,605 1575.35,605 1505,675.35 1505,725 1523.19,743.19 1976.93,743.19 R16.2
PB3: JTAG?.13 R19.2 U1.89 | length 4844.1
  Top Layer w10: R19.2 1643.37,810 1682.31,771.06 1768.35,771.06 1785,787.71 1785,828 1698,915 1535,915 1450,830 1450,625 1735,340 JTAG?.13 1735,193 1785,155 1785,83 1822,46 2409,46 2484,121 v2(2484,1862) ; v1(1800,1909) 1800,1875.32 U1.89
  Bottom Layer w10: v1(1800,1909) 1847,1862 v2(2484,1862)
PB4: JTAG?.3 R15.2 U1.90 | length 2779.4
  Top Layer w10: U1.90 1780.63,1788 1881,1687.63 v1(1881,1589) ; R15.2 2257.88,757.12 2257.88,647.12 2185,574.25 2185,265 2225,225 JTAG?.3 2355.81,345.81 2355.81,1478.19 v1(2328.94,1505.06)
  Bottom Layer w10: v1(1881,1589) 1964.94,1505.06 v1(2328.94,1505.06)
PDR_ON: R3.1 R4.1 U1.99 | length 2430.9
  Top Layer w10: U1.99 v1(1603.46,1938) ; v2(2980,1980) R3.1 R4.1
  Bottom Layer w10: v1(1603.46,1938) 1555,1938 1510,1893 1510,1858.06 1523,1845.06 1816.47,1845.06 1833.62,1827.91 2796.5,1827.91 2796.5,1941.5 2835,1980 v2(2980,1980)
PE0: P_E.1 U1.97 | length 2854.7
  Top Layer w10: U1.97 v1(1642.83,1975)
  Bottom Layer w10: v1(1642.83,1975) 1980,1975 2270,2265 2528.44,2265 2621.44,2172 3287,2172 3342,2227 3342,2552 P_E.1
PE1: P_E.2 U1.98 | length 2937.6
  Top Layer w10: v1(1623.15,1768) U1.98
  Bottom Layer w10: v1(1623.15,1768) 1655.19,1800.04 3162.04,1800.04 3642,2280 3642,2419 3688,2465 3740,2465 3758,2483 3758,2762 P_E.2
PE2: P_E.3 U1.1 | length 2780.5
  Top Layer w10: U1.1 1544,1776.22 1540.48,1784.55 v1(1529.5,1810.5)
  Bottom Layer w10: v1(1529.5,1810.5) 1532.97,1813.97 3055.97,1813.97 3593.06,2351.06 3593.06,2641.06 3667,2715 P_E.3
PE3: P_E.4 U1.2 | length 3364.5
  Top Layer w10: U1.2 1563,1756.54 1572,1765.54 1572,1789 1568,1793 1568,1855 v1(1544,1879)
  Bottom Layer w10: v1(1544,1879) 1544,1876 1698.31,1876 1765.74,1943.43 1821.51,1943.43 1888.94,1876 2398.12,1876 2461.12,1939 2490.88,1939 2588.03,1841.85 2782.56,1841.85 2782.56,2096.56 2840,2154 3343,2154 3456,2267 3456,2584.47 3625,2753.47 3731,2753.47 3743.47,2741 3743.47,2653.47 P_E.4
PE4: P_E.5 U1.3 | length 2765.6
  Top Layer w10: U1.3 1583,1736.85 1585.85,1734 1651,1734 v1(1682,1765) ; v2(3370,1797) 3370,1813 3744,2187 3744,2476 P_E.5
  Bottom Layer w10: v1(1682,1765) 1698,1781 3354,1781 v2(3370,1797)
PE5: P_E.6 U1.4 | length 2785
  Top Layer w10: U1.4 1651.83,1717.17 v1(1791,1578) ; v1(3108,1573) 3108,1818 P_E.6
  Bottom Layer w10: v1(1791,1578) 1849.94,1636.94 1928.94,1636.94 1992.88,1573 v1(3108,1573)
PE6: P_E.7 U1.5 | length 2922.1
  Top Layer w10: U1.5 1637,1697.48 1675,1659.48 1675,1631.48 1639,1595.48 1639,1555 1663.88,1530.12 1874,1530.12 1931,1587.12 v1(1931,1747)
  Bottom Layer w10: v1(1931,1747) 1946,1762 3387,1762 3404,1779 3404,2014 P_E.7
PE7: P_E.8 U1.38 | length 2723.7
  Top Layer w10: U1.38 1820,1191 1831,1180 1831,1129 v1(1862,1098) ; v2(3008,1344) 3320,1656 3320,1830 P_E.8
  Bottom Layer w10: v1(1862,1098) 1862,1132 1917,1187 1961,1187 2012,1136 2960,1136 3008,1184 v2(3008,1344)
PE8: P_E.9 U1.39 | length 3806.2
  Top Layer w10: U1.39 1839.69,1295.38 1808.06,1327 1808.06,1373 v1(1843,1407.94) ; v2(3672,1673) 3672,2043 3764,2135 3764,2751.19 3752.6,2762.6 3752.6,2862.6 P_E.9
  Bottom Layer w10: v1(1843,1407.94) 1757.06,1493.88 1757.06,1633.15 1740.78,1649.43 1740.78,1683 1760.78,1703 1830.26,1703 1866.39,1666.88 1973.02,1666.88 1976.97,1662.93 2391.46,1662.93 2424.33,1630.06 3223.87,1630.06 3234.81,1641 3640,1641 v2(3672,1673)
PE9: P_E.10 U1.40 | length 3771.2
  Top Layer w10: U1.40 1859.37,1155.63 1943,1072 v1(1943,1060.12) ; v2(3603,1101) 3647.89,1101 3735.88,1188.99 3735.88,2012.07 3871.34,2147.53 3871.34,2748.66 P_E.10
  Bottom Layer w10: v1(1943,1060.12) 1950.94,1068.06 2377.9,1068.06 2397.99,1088.15 3590.15,1088.15 v2(3603,1101)
PE10: P_E.11 U1.41 | length 3694.7
  Top Layer w10: v1(1858,1342) 1858,1311.18 1879.06,1290.13 U1.41
  Bottom Layer w10: v1(1858,1342) 1743.12,1456.88 1743.12,1591.88 1725.84,1609.16 1725.84,1699 1743.84,1717 1872,1717 1907.88,1681.12 1993.05,1681.12 1997.3,1676.87 3134.53,1676.87 3156,1698.34 3516.34,1698.34 3539,1721 3829,1721 3857.4,1749.4 3857.4,2662.6 P_E.11
PE11: P_E.12 U1.42 | length 3738.2
  Top Layer w10: U1.42 1898.74,1298.74 v1(1911,1311)
  Bottom Layer w10: v1(1911,1311) 1903,1303 1779,1303 1729.19,1352.81 1729.19,1572.81 1687,1615 1687,1719 1701,1733 1896,1733 1932,1697 2009,1697 2012,1694 3123.78,1694 3142.06,1712.28 3446.28,1712.28 3473,1739 3817,1739 3843.47,1765.47 3843.47,2576.53 P_E.12
PE12: P_E.13 U1.43 | length 4991.1
  Top Layer w10: U1.43 1918.43,1168.57 v1(1934,1153) ; v2(3706,666) 3749.81,709.81 3749.81,1805.81 3763,1819 3827,1819 3885.28,1877.28 3885.28,2795.72 3827,2854 3777.53,2854 3766.53,2843 3766.53,2791.47 3804,2754 3828,2754 3843.47,2738.53 3843.47,2553.47 P_E.13
  Bottom Layer w10: v1(1934,1153) 1909.06,1128.06 1909.06,977.94 2218.13,668.87 2243.47,668.87 2251.34,676.75 2330.66,676.75 2338.53,668.87 2371.69,668.87 2374.56,666 v2(3706,666)
PE13: P_E.14 U1.44 | length 3197.5
  Top Layer w10: U1.44 1938.11,1195 1982,1151.11 v1(1982,1102) ; v2(3647,1181) 3647,1527.18 3721.94,1602.12 3721.94,2042.06 3857.4,2177.53 3857.4,2267.4 3843.47,2281.34 3843.47,2376.53 P_E.14
  Bottom Layer w10: v1(1982,1102) 1982.08,1102.08 3011.08,1102.08 3090,1181 v2(3647,1181)
PE14: P_E.15 U1.45 | length 3414.1
  Top Layer w10: v1(1912,1373) 1957.8,1327.2 U1.45 ; v2(3359,1461) 3359,1731 3465,1837 3465,1888 3496,1919 3603,1919 3632,1890 3632,1649 3646,1635 3692,1635 3708,1651 3708,2056 3843.47,2191.47 3843.47,2233.53 3805,2272 P_E.15
  Bottom Layer w10: v1(1912,1373) 1969.19,1430.19 1969.19,1475 1985.31,1491.13 2085.72,1491.13 2091.84,1485 2230,1485 2254,1461 v2(3359,1461)
PE15: P_E.16 U1.46 | length 2621.6
  Top Layer w10: U1.46 1977.48,1299.48 v1(1994.48,1316.48) ; v2(3445,1340) 3445,1744 3499,1798 v2(3499,1854)
  Bottom Layer w10: v1(1994.48,1316.48) 2111.02,1316.48 2134.54,1340 2864.37,1340 2930.19,1405.81 3069.81,1405.81 3135.63,1340 v2(3445,1340) ; v2(3499,1854) 3805,2160 P_E.16
"PWMA T2C1": TB6612.1 U1.23 | length 2776.7
  Top Layer w10: v2(1164,2375) 1170,2369 1170,1945 1325,1790 1325,1660.36 1214.64,1550 1214.64,1490.36 1300,1405 1432.94,1405 1465.99,1371.95 1465.99,1352.16 1475,1343.15 U1.23
  Bottom Layer w10: v2(1164,2375) 1694,2905 TB6612.1
"PWMB T2C2": TB6612.7 U1.24 | length 2734.6
  Top Layer w10: v1(1432,1353) 1461.54,1323.46 U1.24
  Bottom Layer w10: v1(1432,1353) 1603,1353 1627,1377 1627,1475 1610,1492 1480,1492 1410,1562 1410,1603 1382,1631 1214,1631 1112,1733 1112,2099 1224,2211 1898,2211 1970,2283 2245,2283 2267,2305 TB6612.7
RESET: C10.2 JTAG?.15 R6.2 S1.1 U1.14 | length 2531.9
  Top Layer w10: R6.2 C10.2 1159,1735 1169,1725 S1.1 1180,1645 1180,1458.53 1370,1268.53 1370,292 1395,267 1593,267 JTAG?.15 ; v4(1354,1665) 1354,1626 1459.68,1520.32 U1.14
  Bottom Layer w10: S1.1 1297,1725 1354,1668 v4(1354,1665)
"RX HC": HC05.2 U1.25 | length 3395.4
  Top Layer w10: v5(1440,301) 1395,346 1395,1073.72 1554,1232.72 1554,1303.78 U1.25
  Bottom Layer w10: v5(1440,301) 1395.06,256.06 1395.06,83 1463.06,15 3272,15 3340,83 HC05.2
RX_USB: U1.69 USART1.2 | length 4132.5
  Top Layer w10: U1.69 2161,1658.11 2165.89,1663 2232.7,1663 2281.19,1614.52 2281.19,1549.19 2290,1540.37 2290,1472 2334.94,1427.06 2334.94,364.94 2269,299 v1(2253,299)
  Bottom Layer w10: USART1.2 45,160 25,140 25,50 65,10 1056.19,10 1381.12,334.94 2217.06,334.94 v1(2253,299)
"SCL OLED": OLED.3 U1.47 | length 2037.2
  Top Layer w10: v1(1997,1034) 2025,1062 2025,1115 1997.17,1142.83 U1.47 ; v1(2950,1054) OLED.3
  Bottom Layer w10: v1(1997,1034) 1998.94,1035.94 2931.94,1035.94 v1(2950,1054)
"SDA OLED": OLED.4 U1.48 | length 2218.6
  Top Layer w10: U1.48 2016.85,1152.15 2059,1110 2059,1018 v1(2043,1002) ; v1(3044,1014) 3044,1058 2970,1132 2970,1412 3050,1492 OLED.4
  Bottom Layer w10: v1(2043,1002) 2055,1014 v1(3044,1014)
STBY: TB6612.4 U1.7 | length 1794.4
  Top Layer w10: v2(1500.06,2483.93) 1500.06,1888.06 1460,1848 1460,1667.54 1469.43,1658.11 U1.7
  Bottom Layer w10: v2(1500.06,2483.93) 1500.06,2486.06 1619,2605 TB6612.4
"TX HC": HC05.3 U1.26 | length 3111.3
  Top Layer w10: v5(1425,660) 1425,885 1495,955 1495,1098.83 1583.78,1187.61 U1.26
  Bottom Layer w10: v5(1425,660) 1431,660 1556,535 2134,535 2204,605 2315,605 2356,564 2356,369 2290,303 2290,201 2311,180 2745,180 2880,45 3165,45 HC05.3
TX_USB: U1.68 USART1.1 | length 3708.3
  Top Layer w10: U1.68 2166.49,1638.43 2177.06,1648.99 2227,1648.99 2264.12,1611.88 2264.12,1546.25 2275.12,1535.25 2275.12,1369.63 2315,1329.75 2315,534.12 2301,520.12 v4(2301,499)
  Bottom Layer w10: USART1.1 100,96 471,467 2269,467 v4(2301,499)
USART3_RX: U1.56 USART3.2 | length 3026.1
  Top Layer w10: U1.56 2190,1402.2 2201,1391.2 2201,966.44 2285.75,881.68 2285.75,586.25 v4(2291,581)
  Bottom Layer w10: USART3.2 770,435 2303,435 2335,467 2335,537 v4(2291,581)
USART3_TX: U1.55 USART3.1 | length 2997.6
  Top Layer w10: U1.55 2164.48,1382.52 2184,1363 2184,951 2271.81,863.19 2271.81,633.19 2253,614.37 v1(2253,356)
  Bottom Layer w10: USART3.1 791,356 v1(2253,356)
VBAT: C9.2 D1.2 U1.6 | length 3430.7
  Top Layer w10: v6(1140,2070) 1140,2330.69 947,2523.69 947,3007 979.49,3039.49 1783.51,3039.49 1858.19,2964.81 D1.2 1858.19,2913 1995,2776.19 C9.2 ; U1.6 1606.2,1677.8 v5(1638,1646)
  Bottom Layer w10: v6(1140,2070) 1140,2060 1425,1775 1425,1604 1512.12,1516.88 1638,1523 v5(1638,1646)
VCC: C11.1 C12.1 C13.1 C14.1 C15.1 C16.1 C17.1 C18.1 C19.1 D1.1 D2.1 D3.1 D4.1 D5.1 D6.1 HC05.5 JTAG?.1 JTAG?.2 LM2596_VCC.5 MOTORL.2 MOTORR.2 MPU6050.6 OLED.2 R1.2 R4.2 R6.1 R11.2 R12.2 R13.2 R14.1 R15.1 R16.1 R17.1 R19.1 TB6612.10 U1.11 U1.19 U1.28 U1.50 U1.75 U1.100 | length 22373.2
  Top Layer w10: 1525,1955 1583.78,1896.22 U1.100 ; U1.75 2183.78,1776.22 2255,1847.44 2255,2816.81 2140.81,2931 D1.1
  Top Layer w12: D6.1 1365,2110 1245,2110 1215,2080 1215,1985 1265,1935 1320,1935 1415.06,1839.94 1415.06,1631.06 1466.75,1579.37 U1.11 1580.63,1579.37 1630,1530 1630,1445 v1(1606.89,1421.89) ; U1.19 v1(1606.89,1421.89) ; 1525,1955 v1(1525,2110) ; U1.28 1623.15,1326.85 1606.89,1343.11 v1(1606.89,1421.89) ; R16.1 2115,771.25 2115,1182.01 U1.50
  Top Layer w30: D5.1 D4.1 D3.1 D2.1 843,1621.89 846.11,1625 R6.1 940,1385 1235,1090 R1.2 ; R14.1 605,705 R13.2 R12.2 R11.2 100,705 45,650 45,425 190,280 1080,280 1339,21 2941,21 HC05.5 ; D6.1 1435,2180 v2(1435,2385) ; v7(1560,700) 1615,645 1827.5,645 R17.1 R16.1 R15.1 ; D1.1 2131.81,2922 2140.81,2931 2254.81,3045 2491.81,3045 2675,2861.81 v2(2675,2755) ; JTAG?.2 JTAG?.1 ; R4.2 3360,2450 3180,2450 3035,2305 TB6612.10 2896,2305 2850,2259 OLED.2 2850,310 HC05.5 ; MOTORR.2 3895,1375 3895,1225 3815,1145 MPU6050.6 3890,825 3890,365 3713,188 3108,188 HC05.5
  Bottom Layer w12: v1(1420,2160) 1505,2160 1525,2140 v1(1525,2110)
  Bottom Layer w30: v7(1230,825) 1290,765 1495,765 v7(1560,700) 1630,630 2195.15,630 2196.15,631 2332.85,631 2353.85,610 C11.1 ; LM2596_VCC.5 v2(1435,2385) 1435,2500 1790,2855 2575,2855 v2(2675,2755) 2675,2408 2671,2404 2770,2305 TB6612.10 ; JTAG?.1 2425,315 C11.1 ; HC05.5 3040,362 3040.62,362.62 C16.1 ; C19.1 3350,595 3345,600 C18.1 C17.1 3104,600 3099,605 C16.1 ; MOTORL.2 MOTORR.2 ; C11.1 2484,610 2489,605 C12.1 C13.1 C14.1 C15.1 C16.1
VM: LM2596_VM.5 TB6612.9 | length 2986.4
  Bottom Layer w10: LM2596_VM.5 258.25,2261 1902,2261 1941,2300 2215,2300 2253,2338 2390,2338 2404,2324 2560,2324 2679,2205 TB6612.9
pads on no net: HC05.1 HC05.6 JTAG?.11 JTAG?.17 JTAG?.19 LM2596_VCC.2 LM2596_VM.2 U1.30 U1.35 U1.36 U1.37 U1.51 U1.52 U1.53 U1.54 U1.57 U1.58 U1.61 U1.62 U1.67 U1.70 U1.71 U1.81 U1.82 U1.83 U1.84 U1.85 U1.86 U1.87 U1.88 U1.91 U1.95 U1.96
copper on no net:
  other v3: 511.81,393.7 3425.2,393.7 511.81,2755.91 3425.2,2755.91 511.81,2757.2

## Polygon pours and split planes (outlines as drawn)
GND on Top Layer "Top Layer-No Net" (solid, pour order 0): -5,-5 -5,3144.61 3932.01,3144.61 3932.01,-7.99 -2.01,-7.99
GND on Bottom Layer "Top Layer-No Net" (solid, pour order 2): -5,-5 -5,3144.61 3932.01,3144.61 3932.01,-7.99 -2.01,-7.99

## Keep-outs
Keep-Out Layer:
  lines w10: 3930,-10 3919.02,-10 0,-10 -5,-5 -5,3144.61 3932.01,3144.61 3932.01,2.99 3932.01,-7.99

## Silkscreen, mask and mechanical layers (free items; w line width, h text height)
Top Overlay:
  text "毕业设计 二轮自平衡小车" at 515,1420 h300

## Text inside footprints (layer, text, board x,y; h text height)
P_E: Top Overlay "9" at 3785,3015 h50 r270; Top Overlay "1" at 3685,3015 h50 r270; Top Overlay "8" at 3685,2135 h50 r270; Top Overlay "16" at 3785,2135 h50 r270